# Altium PCB Copy of PCB final.PcbDoc
Units mm, origin at the board's own origin, x right, y up, seen from the top; angles counter-clockwise.
Board outline 93.34 x 63.75 mm, 2 copper layers (Top Layer, Bottom Layer); 13 components, 19 nets, 86 pads, 0 vias.
Unrouted connection lines stored in the file: 1.
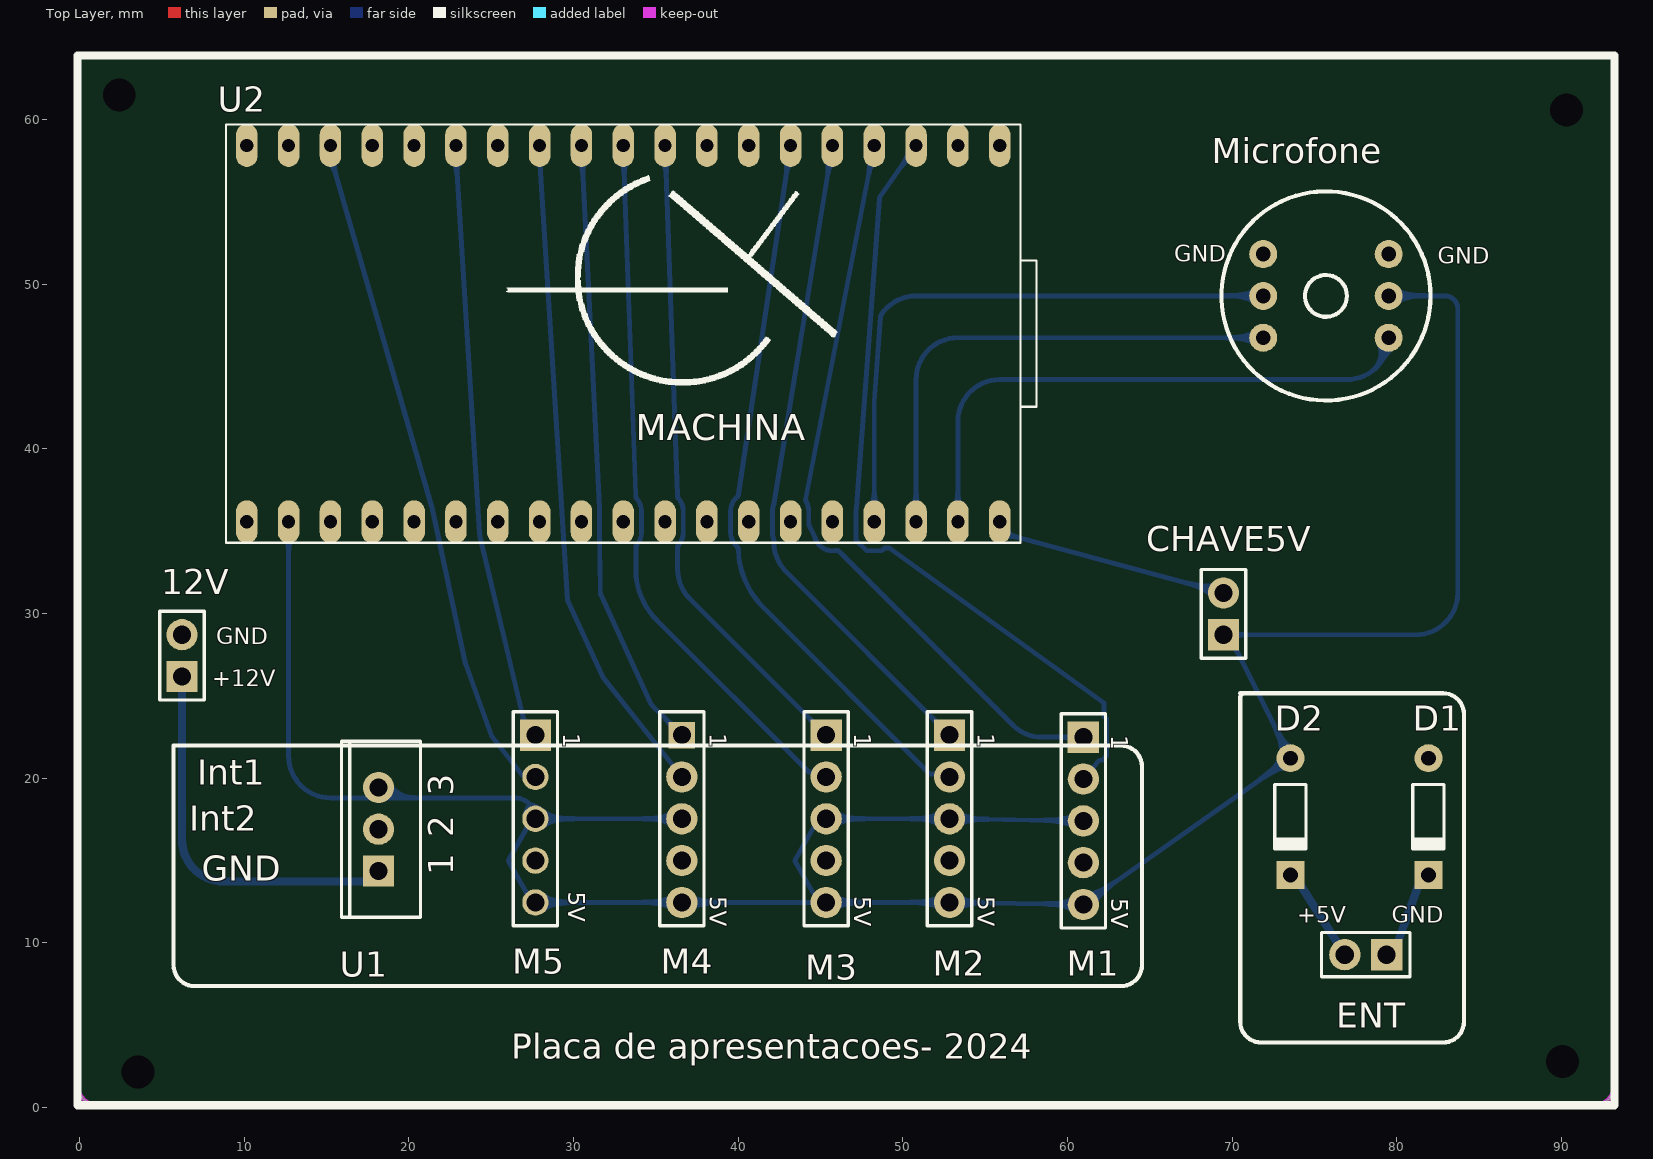
[diagram p0: Top Layer view]
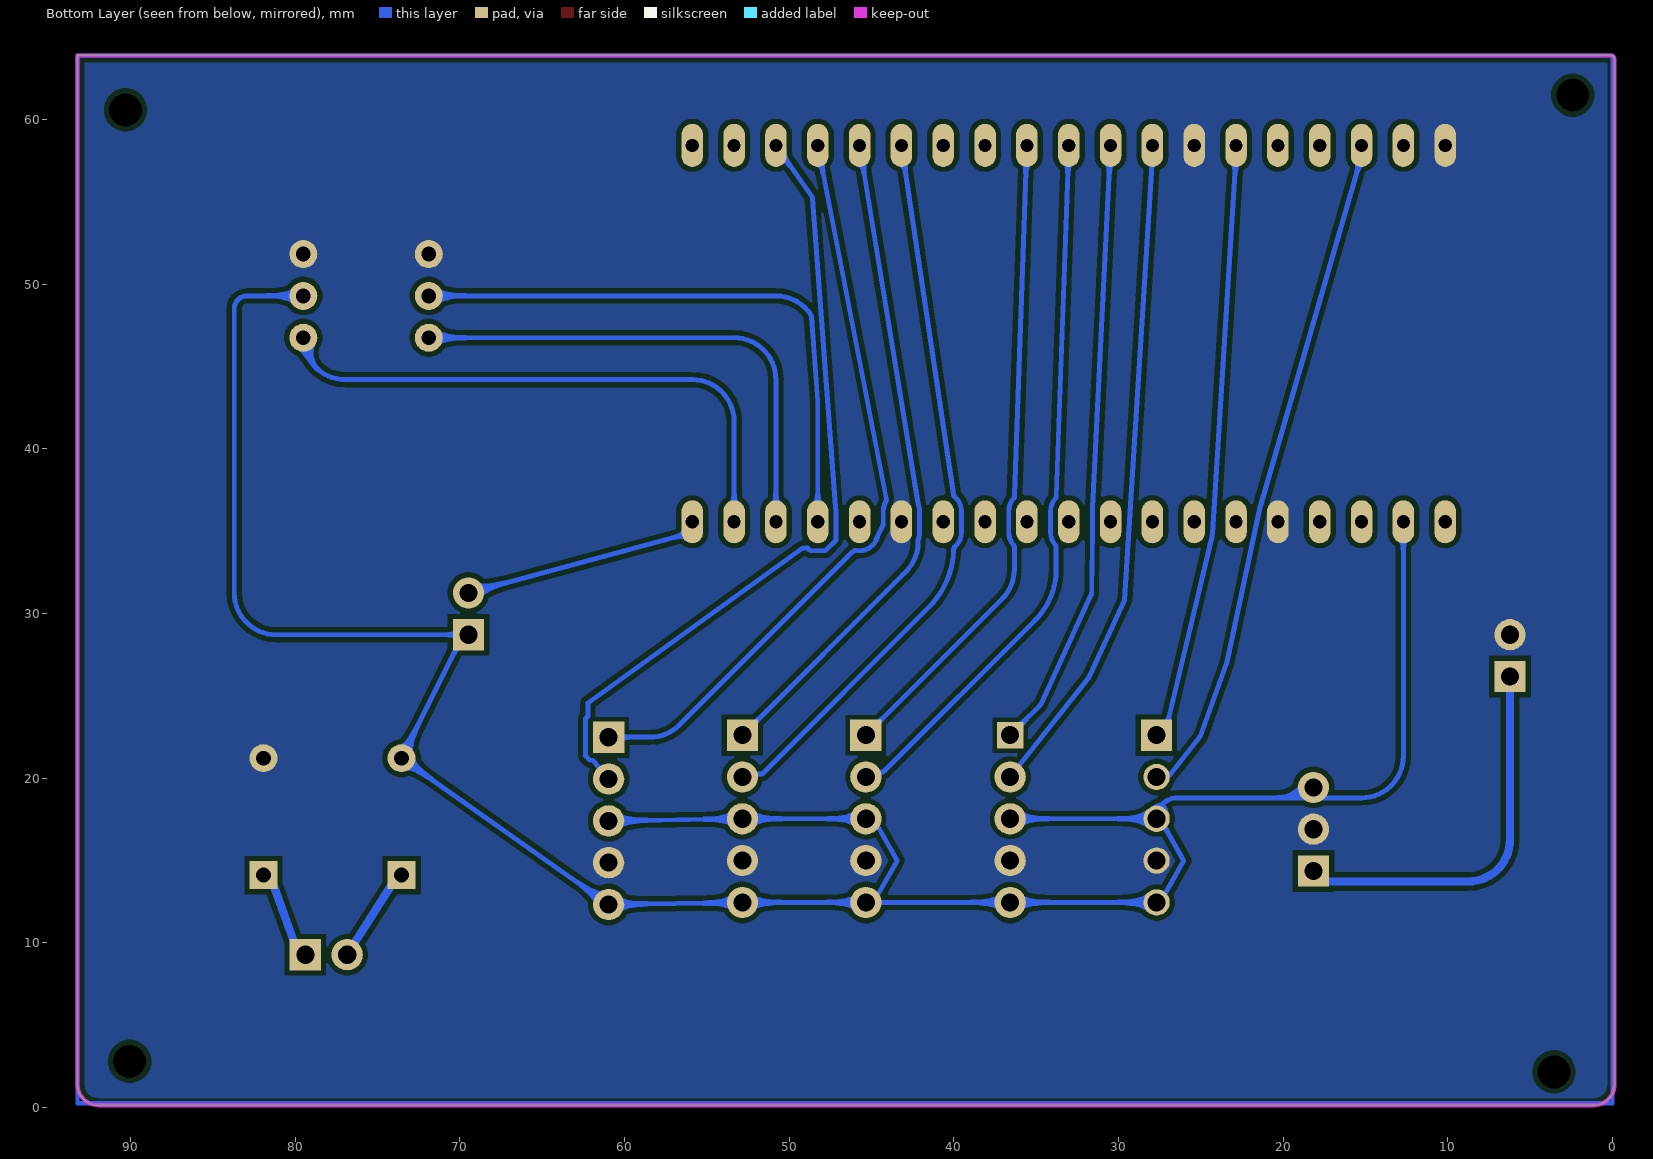
[diagram p1: Bottom Layer view, seen from below]

## Layer stack, top to bottom
Top Solder: solder mask 0.0102, Solder Resist, Dk 3.5
Top Layer: signal copper 0.0356
Dielectric 1: dielectric 0.32, FR-4, Dk 4.8
Bottom Layer: signal copper 0.0356
Bottom Solder: solder mask 0.0102, Solder Resist, Dk 3.5

## Board outline
-0.127,1.397 ccw(c1.143,1.397) 1.143,0.127 91.948,0.127 ccw(c91.948,1.397) 93.218,1.397 93.218,63.881 0.127,63.881 ccw(c0.127,63.627) -0.127,63.627

## Design rules (kind name [scope] priority, off if disabled: settings)
Clearance [All] p1: gap=0.3 ignorepadtopadclearanceinfootprint=FALSE
HoleSize [All] p1: absolutevalues=TRUE maxlimit=10 minlimit=0.4 maxpercent=80.000 minpercent=20.000
PolygonConnect [All] p1: connectstyle=Direct reliefconductorwidth=0.254 reliefentries=4 polygonreliefangle="90 Angle" airgapwidth=0.254
RoomDefinition "SCH Placa presentation" [InComponentClass('SCH Placa presentation')] p1: confinementstyle=ConfineIn formatcopy=TRUE lockcomponents=FALSE outline 0,0 92.964,0 92.964,63.627 0,63.627
RoutingVias [All] p1: holewidth=0.4 width=1.2 viastyle="Through Hole" minholewidth=0.4 minwidth=1.2 maxholewidth=10 maxwidth=10
SilkToSilkClearance [All] p1: silktosilkclearance=0.3
SolderMaskExpansion [All] p1: expansion=0.102 istentingtop=FALSE
Width [All] p1: maxlimit=10 minlimit=0.3 preferedwidth=0.3
28 further rules are at their usual default settings.

## Components (designator, comment, footprint, x,y, rotation, side; value= is the part's Value field where it differs from the comment)
12V "61300211121" 61300211121 6.223,27.432 r90 top
CHAVE5V "61300211121" 61300211121 69.469,29.972 r90 top
D1 "Diode 1N4148" DO-35 81.915,17.653 r270 top
D2 "Diode 1N4148" DO-35 73.533,17.653 r270 top
ENT "61300211121" 61300211121 78.105,9.271 r180 top
M1 "61300511121" 61300511121#1 60.96,17.399 r270 top
M2 "61300511121" 61300511121#1 52.832,17.526 r270 top
M3 "61300511121" 61300511121#1 45.339,17.526 r270 top
M4 "61300511121" 61300511121#2 36.576,17.526 r270 top
M5 "61300511121" 61300511121#3 27.686,17.526 r270 top
Microfone "INMP441-MEMS-I2S-MIC-MODULE" INMP441-MEMS-I2S-MIC-MODULE 75.692,49.276 r0 top
U1 "5V" TO-220-AB 18.161,16.891 r90 top
U2 "NODE MCU 32S" BOARD 33.02,46.99 r90 top

## Footprints (in the part's own frame and the unit in brackets; to place one, negate y for a bottom-side part, rotate by r counter-clockwise, add the part's x,y. Pads: shape width x height; smd on the part's side, far side on the other; paste and mask are expansions set on the pad)
61300211121 [mm] "Pin Header, pitch 2.54 mm, THT, Vertical, single row, 2p"
  rect 1.9x1.9 hole 1.1: 1(-1.27,0)
  round 1.9 hole 1.1: 2(1.27,0)
  silkscreen extent -2.69,-1.35 2.69,1.35, body extent -2.54,-1.27 2.54,1.27, height 8.57
61300511121#1 [mm] "Pin Header, pitch 2.54 mm, THT, Vertical, single row, 5p"
  rect 1.9x1.9 hole 1.1: 1(-5.08,0)
  round 1.9 hole 1.1: 2(-2.54,0) 3(0,0) 4(2.54,0) 5(5.08,0)
  silkscreen extent -6.5,-1.35 6.5,1.35, body extent -6.35,-1.27 6.35,1.27, height 8.57
61300511121#2 [mm] "Pin Header, pitch 2.54 mm, THT, Vertical, single row, 5p"
  rect 1.6x1.6 hole 1.1: 1(-5.08,0)
  round 1.9 hole 1.1: 2(-2.54,0) 3(0,0) 4(2.54,0) 5(5.08,0)
  silkscreen extent -6.5,-1.35 6.5,1.35, body extent -6.35,-1.27 6.35,1.27, height 8.57
61300511121#3 [mm] "Pin Header, pitch 2.54 mm, THT, Vertical, single row, 5p"
  rect 1.9x1.9 hole 1.1: 1(-5.08,0)
  round 1.6 hole 1.1: 2(-2.54,0) 3(0,0) 4(2.54,0) 5(5.08,0)
  silkscreen extent -6.5,-1.35 6.5,1.35, body extent -6.35,-1.27 6.35,1.27, height 8.57
BOARD [mm]
  oval 2.616x1.308 hole 0.8: 1(-11.43,22.86) 2(-11.43,20.32) 3(-11.43,17.78) 4(-11.43,15.24) 5(-11.43,12.7) 6(-11.43,10.16) 7(-11.43,7.62) 8(-11.43,5.08) 9(-11.43,2.54) 10(-11.43,0) 11(-11.43,-2.54) 12(-11.43,-5.08) 13(-11.43,-7.62) 14(-11.43,-10.16) 15(-11.43,-12.7) 16(-11.43,-15.24) 17(-11.43,-17.78) 18(-11.43,-20.32) 19(-11.43,-22.86) 20(11.43,22.86) 21(11.43,20.32) 22(11.43,17.78) 23(11.43,15.24) 24(11.43,12.7) 25(11.43,10.16) 26(11.43,7.62) 27(11.43,5.08) 28(11.43,2.54) 29(11.43,0) 30(11.43,-2.54) 31(11.43,-5.08) 32(11.43,-7.62) 33(11.43,-10.16) 34(11.43,-12.7) 35(11.43,-15.24) 36(11.43,-17.78) 37(11.43,-20.32) 38(11.43,-22.86)
  silkscreen extent -12.7,-25.08 12.7,24.13, body extent -12.78,-24.77 12.77,24.14, height 9.71
DO-35 [mm] "Diode, Axial; Body 3.8 x 1.9 mm (LxDia. max), Lead Dia. 0.53 mm (max)"
  round 1.7 hole 0.9: 1(-3.55,0)
  rect 1.7x1.7 hole 0.9: 2(3.55,0)
  silkscreen extent -1.95,-0.95 2.05,0.95, body extent -4.06,-1.27 4.06,1.22, height 3.23
INMP441-MEMS-I2S-MIC-MODULE [mm]
  round 1.7 hole 0.9: 1(3.81,2.54) 2(3.81,0) 3(3.81,-2.54) 4(-3.81,-2.54) 5(-3.81,0) 6(-3.81,2.54)
  silkscreen extent -6.35,-6.35 6.35,6.35, body extent -7.24,-7.25 7.13,7.25, height 5.14
TO-220-AB [mm] "TO, Thru-Hole, Vertical, Heatsink Mounted; 3 In-Line Leads; Pitch 2.54 mm"
  rect 1.9x1.9 hole 1.1: 1(-2.54,0)
  round 1.9 hole 1.1: 2(0,0) 3(2.54,0)
  silkscreen extent -5.35,-2.55 5.35,2.25, body extent -4.98,-1.78 4.98,2.67, height 19.56

## Part data
12V CHAVE5V ENT: "WR-PHD Pin Header, THT, pitch 2.54mm, Single Row, Vertical, 2pin", Contact Resistance=20mOhm, Operating Temperature="-40 to +105degC", Rated Current=3A, Withstanding Voltage=500VAC, Working Voltage=250VAC, ComponentLink1Description=Manufacturer, ComponentLink1URL=http://www.we-online.de, ComponentLink2Description=Datasheet, ComponentLink2URL=https://katalog.we-online.de/em/datasheet/6130xx11121.pdf, Gender=Male, Mounting Technology=THT, Orientation=Vertical, Packaging=Bag, Part Number=61300211121, Pin Number=2, Pitch=2.54mm, Published Date="June 2019", Publisher="Wurth Elektronik", Row Number=Single
D1 D2: "High Conductance Fast Diode", Code_JEDEC=DO-204-AH, ComponentLink1Description="Manufacturer Link", ComponentLink1URL=http://www.fairchildsemi.com/, ComponentLink2Description=Datasheet, ComponentLink2URL=http://www.fairchildsemi.com/ds/1N%2F1N4148.pdf, DatasheetVersion=1997, LatestRevisionDate=17-Jul-2002, LatestRevisionNote="Re-released for DXP Platform.", PackageDescription="Diode, Axial; Body 3.8 x 1.9 mm (LxDia. max), Lead Dia. 0.53 mm (max)", PackageReference=DO-35, Published=8-Jun-2000, Publisher="Altium Limited"
M1 M2 M3 M4 M5: "WR-PHD Pin Header, THT, pitch 2.54mm, Single Row, Vertical, 5pin", Contact Resistance=20mOhm, Operating Temperature="-40 to +105degC", Rated Current=3A, Withstanding Voltage=500VAC, Working Voltage=250VAC, ComponentLink1Description=Manufacturer, ComponentLink1URL=http://www.we-online.de, ComponentLink2Description=Datasheet, ComponentLink2URL=https://katalog.we-online.de/em/datasheet/6130xx11121.pdf, Gender=Male, Mounting Technology=THT, Orientation=Vertical, Packaging=Bag, Part Number=61300511121, Pin Number=5, Pitch=2.54mm, Published Date="June 2019", Publisher="Wurth Elektronik", Row Number=Single
U1: library part LM78XX, "LM7805", LatestRevisionDate=29-May-2009, LatestRevisionNote="IPC-7351 Footprint Added.", PackageDescription="3-Pin Transistor Outline Package 2.54 mm Pitch, 15.1 mm Lead Span", PackageReference=D2PAK, Published=24-Mar-1999, Publisher="Altium Limited"
U2: Package=None, Availability=Warning, Check_prices=https://www.snapeda.com/parts/ESP32-DEVKITC-32D/Espressif%20Systems/view-part/2777395/?ref=eda, MF="Espressif Systems", MP=ESP32-DEVKITC-32D, Price=None, Purchase-URL=https://pricing.snapeda.com/search/part/ESP32-DEVKITC-32D/?ref=eda, SnapEDA_Link=https://www.snapeda.com/parts/ESP32-DEVKITC-32D/Espressif%20Systems/view-part/2777395/?ref=snap

## Free pads (board coordinates)
  round 0 hole 2: 2(90.297,60.579) 3(90.043,2.794) 4(2.413,61.468) 5(3.556,2.159)

## Nets (pads, with @x,y where several pads share a name; then routed paths per layer and width w, separated by ;. In a path a pad name is that pad's centre, name@x,y a point inside that pad or via, vN(x,y) a via of type N, cw(c..) or ccw(c..) an arc to the next point about the centre after c; other vN are vias at no path point)
GND: 12V.2 D1.1 M1.4 M2.4 M3.4 M4.4 M5.4 Microfone.1 Microfone.6 U1.2 U2.5 U2.14 U2.20 U2.26
Net12V_1: 12V.1 U1.1 | length 23.3
  Bottom Layer w0.3: 12V.1@6.119,25.944 12V.1@6.119,26.614
  Bottom Layer w0.5: 12V.1 6.223,16.256 ccw(c8.763,16.256) 8.763,13.716 U1.1@17.526,13.716
NetCHAVE5V_1: CHAVE5V.1 D2.1 M1.3 M1.5 M2.3 M2.5 M3.3 M3.5 M4.3 M4.5 M5.3 M5.5 Microfone.2 U1.3 U2.2 | length 163.5
  Bottom Layer w0.3: U2.2 12.7,21.336 ccw(c15.24,21.336) 15.24,18.796 17.526,18.796 26.416,18.796 cw(c26.416,17.526) M5.3 ; M4.3 M5.3 ; M1.3 M2.3 M3.3 44.783,17.371 43.434,14.986 44.783,12.601 M3.5 ; Microfone.2 82.931,49.276 cw(c82.931,48.514) 83.693,48.514 83.693,31.242 cw(c81.153,31.242) 81.153,28.702 CHAVE5V.1 70.119,28.052 73.432,21.406 D2.1 M1.5 M2.5 M3.5 ; M5.3 27.431,17.455 26.035,14.986 27.431,12.517 M5.5 M4.5 M3.5
NetCHAVE5V_2: CHAVE5V.2 U2.19 | length 14.7
  Bottom Layer w0.3: U2.19 55.88,34.906 CHAVE5V.2
NetD1_2: D1.2 ENT.1 | length 5.6
  Bottom Layer w0.3: ENT.1 ENT.1@80.025,9.921 ; D1.2@81.315,13.503 D1.2
  Bottom Layer w0.5: ENT.1@80.025,9.921 D1.2@81.315,13.503
NetD2_2: D2.2 ENT.2 | length 5.9
  Bottom Layer w0.3: D2.2 D2.2@74.133,13.503
  Bottom Layer w0.5: D2.2@74.133,13.503 ENT.2
NetM1_1: M1.1 U2.35 | length 45.6
  Bottom Layer w0.3: U2.35 48.26,57.977 ccw(c48.432,57.732) 48.138,57.79 44.102,36.971 ccw(c44.396,36.915) 44.136,36.766 cw(c43.18,36.214) 44.284,36.214 44.284,35.444 ccw(c44.584,35.444) 44.314,35.313 44.642,34.642 cw(c44.373,34.509) 44.661,34.595 ccw(c45.72,34.906) 45.893,33.816 cw(c45.939,33.519) 46.152,33.731 56.661,23.222 ccw(c58.456,25.019) 58.456,22.479 M1.1
NetM1_2: M1.2 U2.36 | length 48.5
  Bottom Layer w0.3: U2.36 50.8,58.199 ccw(c50.8,57.899) 50.555,58.072 48.643,55.354 ccw(c48.888,55.182) 48.589,55.204 47.176,36.431 cw(c46.877,36.453) 47.172,36.402 ccw(c48.26,36.214) 47.156,36.214 47.156,34.449 47.803,33.802 48.717,33.802 48.823,33.908 48.88,33.965 49.128,33.965 49.211,33.939 62.21,24.553 62.21,23.765 62.36,23.615 62.36,21.343 62.096,21.079 61.926,21.079 61.799,20.952 61.514,20.547 cw(c59.436,22.007) 61.233,20.212 M1.2
NetM2_1: M2.1 U2.34 | length 40.5
  Bottom Layer w0.3: U2.34 45.72,57.964 ccw(c45.912,57.734) 45.616,57.784 42.17,36.681 cw(c41.873,36.728) 42.153,36.619 ccw(c43.18,36.214) 42.076,36.214 42.076,34.906 ccw(c43.18,34.906) 42.146,34.52 cw(c41.864,34.417) 42.164,34.418 42.164,34.326 ccw(c44.704,34.326) 42.907,32.531 M2.1
NetM2_2: M2.2 U2.33 | length 44.6
  Bottom Layer w0.3: U2.33 43.18,57.958 ccw(c43.381,57.735) 43.085,57.781 40.022,37.234 cw(c39.726,37.28) 39.922,37.053 ccw(c40.64,36.214) 39.536,36.214 39.536,34.906 ccw(c40.64,34.906) 39.906,34.081 cw(c39.706,33.857) 40.006,33.868 ccw(c45.188,34.026) 41.519,30.363 51.634,20.248 52.65,20.248 M2.2
NetM3_1: M3.1 U2.30 | length 39.6
  Bottom Layer w0.3: U2.30 35.56,57.872 cw(c35.283,57.756) U2.30@35.583,57.768 ; U2.30@35.583,57.768 36.318,37.125 ccw(c36.618,37.137) 36.39,36.941 cw(c35.56,36.214) 36.664,36.214 36.664,34.906 cw(c35.56,34.906) 36.394,34.183 ccw(c36.622,33.988) 36.322,33.989 36.322,32.675 ccw(c38.862,32.675) 37.065,30.88 M3.1
NetM3_2: M3.2 U2.29 | length 43.6
  Bottom Layer w0.3: U2.29 33.02,57.872 cw(c32.743,57.756) U2.29@33.043,57.768 ; U2.29@33.043,57.768 33.778,37.125 ccw(c34.078,37.137) 33.85,36.941 cw(c33.02,36.214) 34.124,36.214 34.124,34.906 cw(c33.02,34.906) 33.854,34.183 ccw(c34.082,33.988) 33.782,33.989 33.782,32.675 ccw(c38.162,32.675) 35.062,29.581 44.271,20.372 45.033,20.372 M3.2
NetM4_1: M4.1 U2.28 | length 37.3
  Bottom Layer w0.3: U2.28 30.48,57.889 cw(c30.213,57.752) 30.512,57.768 31.572,36.381 ccw(c31.872,36.397) 31.574,36.359 cw(c30.48,36.214) 31.584,36.214 31.584,35.238 ccw(c31.884,35.238) 31.584,35.235 31.622,31.273 ccw(c31.922,31.276) 31.649,31.152 34.7,24.508 ccw(c34.973,24.634) 34.76,24.422 35.926,23.256 M4.1
NetM4_2: M4.2 U2.27 | length 40.5
  Bottom Layer w0.3: U2.27 27.94,57.766 29.63,30.817 31.773,26.152 M4.2
NetM5_1: M5.1 U2.25 | length 36.4
  Bottom Layer w0.3: U2.25 22.86,57.766 24.298,34.837 ccw(c25.4,34.906) 24.326,34.651 27.036,23.256 M5.1
NetM5_2: M5.2 U2.22 | length 41.1
  Bottom Layer w0.3: U2.22 15.24,57.766 21.381,36.521 cw(c20.32,36.214) 21.399,36.446 23.449,26.922 25.037,22.516 26.897,20.159 M5.2
NetMicrofone_3: Microfone.3 U2.18 | length 35.2
  Bottom Layer w0.3: U2.18 53.34,41.656 cw(c55.88,41.656) 55.88,44.196 76.962,44.196 ccw(c76.962,46.736) Microfone.3
NetMicrofone_4: Microfone.4 U2.17 | length 31.2
  Bottom Layer w0.3: U2.17 50.8,44.196 cw(c53.34,44.196) 53.34,46.736 Microfone.4
NetMicrofone_5: Microfone.5 U2.16 | length 36.2
  Bottom Layer w0.3: U2.16 48.26,42.831 cw(c48.56,42.831) 48.261,42.854 48.65,48.021 cw(c48.949,47.997) 48.7,48.165 cw(c50.8,46.736) 50.8,49.276 Microfone.5
pads on no net: U2.1 U2.3 U2.4 U2.6 U2.7 U2.8 U2.9 U2.10 U2.11 U2.12 U2.13 U2.15 U2.21 U2.23 U2.24 U2.31 U2.32 U2.37 U2.38
copper on no net: | length 627.4
  Bottom Layer w0.254: 0,0.254 93.218,0.254 ; 0,0.254 0,63.881 ; 0,0.254 93.218,0.254 ; 0,0.254 0,63.881 ; 0,63.881 93.218,63.881 ; 0,63.881 93.218,63.881 ; 93.218,0.254 93.218,63.881 ; 93.218,0.254 93.218,63.881

## Polygon pours and split planes (outlines as drawn)
GND on Bottom Layer "NONET_L-01_P-001" (solid, pour order 0): 0,63.881 92.964,63.881 cw(c92.964,63.754) 93.091,63.754 93.091,0 ccw(c92.964,0) 92.964,0.127 0.381,0.127 cw(c0.381,0.508) 0,0.508

## Keep-outs
Keep-Out Layer:
  the board outline again, w0.254

## Silkscreen, mask and mechanical layers (free items; w line width, h text height)
Top Overlay:
  drawing of 21 lines, arcs and shapes, not listed
  text "GND" at 66.467,51.354 h1
  text "GND" at 82.469,51.227 h1
  text "MACHINA" at 33.782,40.513 h1.6
  text "GND" at 8.301,28.113 h1
  text "+12V" at 8.047,25.573 h1
  text "Int1" at 7.158,19.604 h1.52
  text "Int2" at 6.65,16.81 h1.52
  text "GND" at 7.412,13.762 h1.52
  text "+5V" at 73.96,11.222 h1
  text "GND" at 79.675,11.222 h1
  text "Placa de apresentacoes- 2024" at 26.208,2.967 h1.52

## Text inside footprints (layer, text, board x,y; h text height)
M1: Top Overlay "1" at 62.66,22.599 h1.02 r270; Top Overlay "5V" at 62.66,12.699 h1.02 r270
M2: Top Overlay "1" at 54.532,22.726 h1.02 r270; Top Overlay "5V" at 54.532,12.826 h1.02 r270
M3: Top Overlay "1" at 47.039,22.726 h1.02 r270; Top Overlay "5V" at 47.039,12.826 h1.02 r270
M4: Top Overlay "1" at 38.276,22.726 h1.02 r270; Top Overlay "5V" at 38.276,12.826 h1.02 r270
M5: Top Overlay "5V" at 29.693,13.106 h1.02 r270; Top Overlay "1" at 29.386,22.726 h1.02 r270
U1: Top Overlay "3" at 22.686,18.931 h1.5 r90; Top Overlay "2" at 22.686,16.391 h1.5 r90; Top Overlay "1" at 22.686,14.101 h1.5 r90